# Altium PCB Dental Sensor.PcbDoc
Units mm, origin at the board's own origin, x right, y up, seen from the top; angles counter-clockwise.
Board outline 35.78 x 6.5 mm, 2 copper layers (Top Layer, Bottom Layer), stack 0.287 mm thick; 28 components, 20 nets, 99 pads, 47 vias.
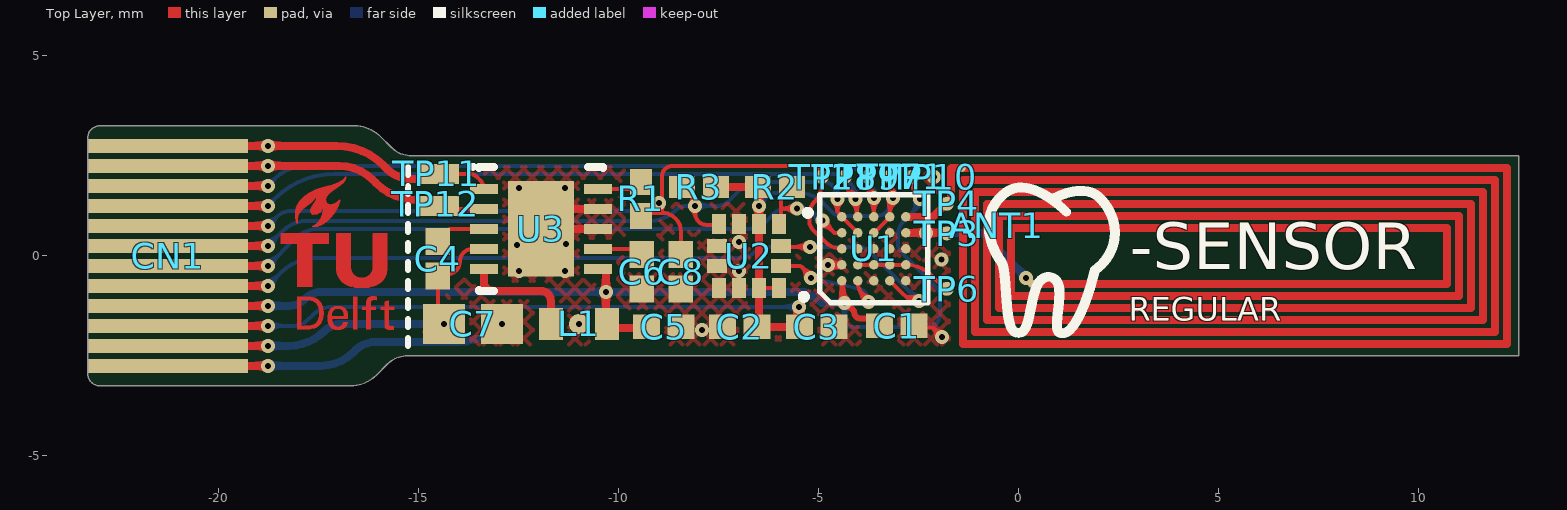
[diagram p0: Top Layer view]
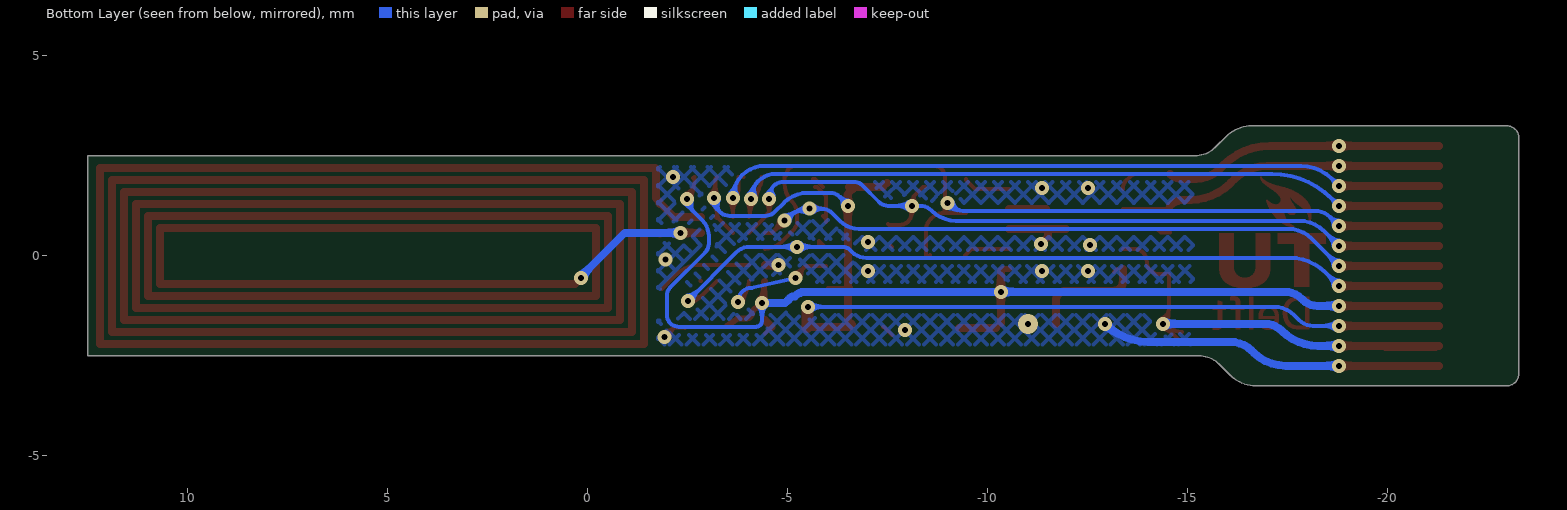
[diagram p1: Bottom Layer view, seen from below]

## Layer stack, top to bottom
Flex Stack Top Coverlay: solder mask 0.05, FC-001, Dk 4
Top Layer: signal copper 0.018
Core: core 0.051, Core-025, Dk 4.6
Bottom Layer: signal copper 0.018
Flex Stack Bottom Coverlay: solder mask 0.05, FC-001, Dk 4
Stiffener 1: core 0.2, Core-009, Dk 4.5

## Board outline
-22.984,-3.25 cw(c-22.975,-2.95) -23.275,-2.941 -23.275,2.941 -23.275,2.959 cw(c-22.975,2.95) -22.966,3.25 -16.6,3.25 cw(c-16.6,2.345) -15.96,2.985 -15.687,2.712 ccw(c-15.175,3.224) -15.175,2.5 12.5,2.5 12.5,-2.5 -15.275,-2.5 ccw(c-15.275,-3.224) -15.787,-2.712 -16.06,-2.985 cw(c-16.7,-2.345) -16.7,-3.25

## Design rules (kind name [scope] priority, off if disabled: settings)
BoardOutlineClearance "Edge Connector" [HasFootprint('52745-1297')] p1: gap=0 ignorepadtopadclearanceinfootprint=FALSE
BoardOutlineClearance [All] p2: gap=0.2 ignorepadtopadclearanceinfootprint=FALSE
Clearance Clearance_Testpad [InComponent('TP*')] p1: gap=0.1 ignorepadtopadclearanceinfootprint=FALSE except(0.06: Arc-SMDPad Track-SMDPad SMDPad-SMDPad)
Clearance [All] p2: gap=0.1 ignorepadtopadclearanceinfootprint=FALSE
ComponentClearance [InComponent('TP*')] p1: gap=0 collisioncheckmode=3 verticalgap=0.15 showdistances=FALSE
ComponentClearance ComponentClearance_1 [All] p2: gap=0.15 collisioncheckmode=3 verticalgap=0.15 showdistances=FALSE
DiffPairsRouting [All] p1: maxlimit=0.254 minlimit=0.254 mostfreqgap=0.254 toplayer_minwidth=0.381 toplayer_maxwidth=0.381 toplayer_prefwidth=0.381 bottomlayer_minwidth=0.381 bottomlayer_maxwidth=0.381 bottomlayer_prefwidth=0.381 substack1={9C96DA8B-F9AD-4D0B-9D00-B80C23C507E5} toplayer_{9c96da8b-f9ad-4d0b-9d00-b80c23c507e5}_minwidth=0.381 toplayer_{9c96da8b-f9ad-4d0b-9d00-b80c23c507e5}_maxwidth=0.381 toplayer_{9c96da8b-f9ad-4d0b-9d00-b80c23c507e5}_prefwidth=0.381 bottomlayer_{9c96da8b-f9ad-4d0b-9d00-b80c23c507e5}_minwidth=0.381 bottomlayer_{9c96da8b-f9ad-4d0b-9d00-b80c23c507e5}_maxwidth=0.381 bottomlayer_{9c96da8b-f9ad-4d0b-9d00-b80c23c507e5}_prefwidth=0.381 maxuncoupledlength=12.7
HoleSize [All] p1: absolutevalues=TRUE maxlimit=2.54 minlimit=0.15 maxpercent=80.000 minpercent=20.000
MinimumAnnularRing [All] p1: minimumring=0.1
MinimumSolderMaskSliver BGA [HasFootprint('WLCSP25')] p1: minsoldermaskwidth=0.06
MinimumSolderMaskSliver [All] p2: minsoldermaskwidth=0.09
PolygonConnect [All] p1: connectstyle=Direct reliefconductorwidth=0.254 reliefentries=4 polygonreliefangle="90 Angle" airgapwidth=0.1
RoutingVias [All] p1: holewidth=0.15 width=0.35 viastyle="Through Hole" minholewidth=0.15 minwidth=0.35 maxholewidth=1 maxwidth=2
SilkToSolderMaskClearance [IsPad] p1: minsilkscreentomaskgap=0.2 clearancetoexposedcopper=TRUE
SolderMaskExpansion [All] p1: expansion=0.102 istentingtop=FALSE
UnRoutedNet [All] p1: checkbadconnections=TRUE
Width [All] p1: maxlimit=1 minlimit=0.06 preferedwidth=0.15 substack1={9C96DA8B-F9AD-4D0B-9D00-B80C23C507E5} minimp=50.000000 maximp=50.000000 favimp=50.000000
24 further rules are at their usual default settings.

## Components (designator, comment, footprint, x,y, rotation, side; value= is the part's Value field where it differs from the comment)
ANT1 "Antenna" "NFC Antenna" 5.275,-0.1 r0 top net-tie
C1 "0.10µF" CAPC1005X03N -3.05,-1.75 r0 top
C2 "2.2µF" CAPC1005X03N -6.975,-1.775 r180 top
C3 "0.10µF" CAPC1005X03N -5.05,-1.775 r0 top
C4 "1µF" CAPC1005X03N -14.525,-0.075 r90 top
C5 "10µF" CAPC1005X03N -8.875,-1.775 r0 top
C6 "4.7µF" CAPC1005X03N -9.425,-0.4 r270 top
C7 "22µF" CAPC1608X12N -13.65,-1.7 r0 top
C8 "1000pF" CAPC1005X03N -8.45,-0.4 r270 top
CN1 "FPC Connector" 52745-1297 -21.275,0 r0 top locked
L1 "MLZ1608N100LT000" FP-MLZ1608-MFG -11,-1.7 r0 top
R1 "1M" RESC1005X03N -9.45,1.425 r270 top
R2 "47K" RESC1005X03N -6.1,1.725 r180 top value=47k
R3 "47k" RESC1005X03N -8,1.725 r0 top
TP1 "Testpoint" "Testpoint 0.35mm" -2.662,1.975 r90 top
TP2 "Testpoint" "Testpoint 0.35mm" -4.923,1.975 r90 top
TP3 "Testpoint" "Testpoint 0.35mm" -1.8,0.561 r90 top
TP4 "Testpoint" "Testpoint 0.35mm" -1.8,1.3 r90 top
TP6 "Testpoint" "Testpoint 0.35mm" -1.8,-0.825 r90 top
TP7 "Testpoint" "Testpoint 0.35mm" -3.225,1.975 r90 top
TP8 "Testpoint" "Testpoint 0.35mm" -4.348,1.975 r90 top
TP9 "Testpoint" "Testpoint 0.35mm" -3.774,1.975 r90 top
TP10 "Testpoint" "Testpoint 0.35mm" -2.125,1.975 r90 top
TP11 "Testpoint" "Testpoint 0.35mm" -14.55,2.05 r90 top
TP12 "Testpoint" "Testpoint 0.35mm" -14.575,1.3 r90 top
U1 "NHS3152UK" WLCSP25 -3.625,0.175 r90 top
U2 "AIS2DW12TR" FP-LGA12-DM00369449-MFG -6.75,0 r270 top
U3 "LTC3588EDD-1#PBF" LT-DD-10_V -11.95,0.675 r0 top

## Footprints (in the part's own frame and the unit in brackets; to place one, negate y for a bottom-side part, rotate by r counter-clockwise, add the part's x,y. Pads: shape width x height; smd on the part's side, far side on the other; paste and mask are expansions set on the pad)
52745-1297 [mm] "Cable Side"
  rect 4x0.35 smd paste-2: 1(0,-2.75) 2(0,-2.25) 3(0,-1.75) 4(0,-1.25) 5(0,-0.75) 6(0,-0.25) 7(0,0.25) 8(0,0.75) 9(0,1.25) 10(0,1.75) 11(0,2.25) 12(0,2.75)
CAPC1005X03N [mm] "Chip Capacitor, 2-Leads, Body 1,00x0,50mm, IPC Medium Density"
  rect 0.68x0.62 smd: 1(-0.43,0) 2(0.43,0)
  body extent -0.55,-0.28 0.55,0.27, height 0.3
CAPC1608X12N [mm] "Chip Capacitor, 2-Leads, Body 1,60x0,80mm, IPC Medium Density"
  rect 1.05x1 smd: 1(-0.725,0) 2(0.725,0)
  body extent -0.9,-0.5 0.9,0.5, height 1.2
FP-LGA12-DM00369449-MFG [mm]
  rect 0.5x0.35 smd paste+0 mask+0: 1(-0.8,0.75) 2(-0.8,0.25) 3(-0.8,-0.25) 4(-0.8,-0.75) 7(0.8,-0.75) 8(0.8,-0.25) 9(0.8,0.25) 10(0.8,0.75)
  rect 0.35x0.5 smd paste+0 mask+0: 5(-0.25,-0.8) 6(0.25,-0.8) 11(0.25,0.8) 12(-0.25,0.8)
  silkscreen extent -1.12,1.43 -1.03,1.52, body extent -1.55,-1.55 1.55,1.55, height 0.25
FP-MLZ1608-MFG [mm]
  rect 0.6x0.8 smd paste+0 mask+0: 1(-0.7,0) 2(0.7,0)
  body extent -1.1,-0.58 1.1,0.58, height 0.25
LT-DD-10_V [mm] "SON, 10-Leads, Body 3x3mm, Pitch 0.5mm, Thermal Pad 2.38x1.65mm"
  rect 0.7x0.25 smd mask+0.08: 1(-1.425,1) 2(-1.425,0.5) 3(-1.425,0) 4(-1.425,-0.5) 5(-1.425,-1) 6(1.425,-1) 7(1.425,-0.5) 8(1.425,0) 9(1.425,0.5) 10(1.425,1)
  rect 1.65x2.38 smd mask+0.08: 11(0,0)
  silkscreen extent -1.75,-1.55 1.55,1.6, body extent -1.5,-1.5 1.5,1.5, height 0.8
"NFC Antenna" [mm] "4.5 x 15 mm"
  round 0.2 smd paste-2 mask+0.102: 2(-4.95,-0.6) ""(-6.7,2.3)
  Top Layer lines w0.2: -6.7,2.3 6.925,2.3 6.925,-2.1 -6.675,-2.1 -6.675,2 6.625,2 6.625,-1.8 -6.375,-1.8 -6.375,1.7 6.325,1.7 6.325,-1.5 -6.075,-1.5 -6.075,1.4 6.025,1.4 6.025,-1.175 ; -4.95,-0.6 5.425,-0.6 5.425,0.8 -5.475,0.8 -5.475,-0.9 5.725,-0.9 5.725,1.1 -5.775,1.1 -5.775,-1.2 6.025,-1.2
RESC1005X03N [mm] "Chip Resistor, 2-Leads, Body 1,00x0,50mm, IPC Medium Density"
  rect 0.65x0.55 smd: 1(-0.425,0) 2(0.425,0)
  body extent -0.55,-0.27 0.55,0.28, height 0.3
"Testpoint 0.35mm" [mm]
  round 0.35 smd paste-2 mask+0: 1(0,0)
WLCSP25 [mm]
  round 0.24 smd paste+0.018 mask+0.04: A1(-0.8,0.8) A2(-0.4,0.8) A3(0,0.8) A4(0.4,0.8) A5(0.8,0.8) B1(-0.8,0.4) B2(-0.4,0.4) B3(0,0.4) B4(0.4,0.4) B5(0.8,0.4) C1(-0.8,0) C2(-0.4,0) C3(0,0) C4(0.4,0) C5(0.8,0) D1(-0.8,-0.4) D2(-0.4,-0.4) D3(0,-0.4) D4(0.4,-0.4) D5(0.8,-0.4) E1(-0.8,-0.8) E2(-0.4,-0.8) E3(0,-0.8) E4(0.4,-0.8) E5(0.8,-0.8)
  silkscreen extent -1.35,-1.35 1.35,1.8, body extent -1.27,-1.27 1.27,1.27, height 0.54

## Part data
ANT1: library part "NFC Antenna", "Track 0.2; Gap 0.1; Height 4.6; Width 14.5;"
C1 C3: library part GRM155R60J104KA01D, "CAP CER 0.1UF 6.3V X5R 0402", Digi-Key Part Number=490-6287-1-ND, Manufacturer="Murata Electronics North America", Operating Temperature="-55°C ~ 85°C", Package / Case="0402 (1005 Metric)", Ratings=-, Temperature Coefficient=X5R, Tolerance=±10%, Voltage=6.3V, @ qty=0, Applications="General Purpose", Datasheets=http://www.murata.com/~/media/webrenewal/support/library/catalog/products/capacitor/mlcc/c02e.pdf, Factory Stock=0, Features=-, Height - Seated (Max)=-, Image=//media.digikey.com/Renders/Murata%20Renders/ZRB-SERIES-0402.jpg, Lead Spacing=-, Minimum Quantity=1, Mounting Type="Surface Mount, MLCC", Packaging="Cut Tape (CT)", Part Number=GRM155R60J104KA01D, Part Status=Active, Quantity Available=356062, Series=GRM, Size / Dimension="0.039\" L x 0.020\" W (1.00mm x 0.50mm)", Thickness (Max)="0.022\" (0.55mm)", Unit Price (USD)=0.1
C2: library part GRT155R60J225KE01D, "CAP CER 2.2UF 6.3V X5R 0402", Digi-Key Part Number=490-12250-1-ND, Manufacturer="Murata Electronics North America", Operating Temperature="-55°C ~ 85°C", Package / Case="0402 (1005 Metric)", Ratings=AEC-Q200, Temperature Coefficient=X5R, Tolerance=±10%, Voltage=6.3V, @ qty=0, Applications=Automotive, Datasheets=http://search.murata.co.jp/Ceramy/image/img/A01X/G101/ENG/GRT155R60J225KE01-01.pdf, Factory Stock=0, Features=-, Height - Seated (Max)=-, Image=//media.digikey.com/Renders/Murata%20Renders/ZRB-SERIES-0402.jpg, Lead Spacing=-, Lead Style=-, Minimum Quantity=1, Mounting Type="Surface Mount, MLCC", Packaging="Cut Tape (CT)", Part Number=GRT155R60J225KE01D, Part Status=Active, Quantity Available=39775, Series=GRT, Size / Dimension="0.039\" L x 0.020\" W (1.00mm x 0.50mm)", Thickness (Max)="0.022\" (0.55mm)", Unit Price (USD)=0.12
C4: library part GRM155R70J105MA12D, "CAP CER 1UF 6.3V X7R 0402", Digi-Key Part Number=490-9665-1-ND, Manufacturer="Murata Electronics North America", Operating Temperature="-55°C ~ 125°C", Package / Case="0402 (1005 Metric)", Ratings=-, Temperature Coefficient=X7R, Tolerance=±20%, Voltage=6.3V, @ qty=0, Applications="General Purpose", Datasheets=http://www.murata.com/~/media/webrenewal/support/library/catalog/products/capacitor/mlcc/c02e.pdf, Factory Stock=0, Features="Derating Recommended", Height - Seated (Max)=-, Image=//media.digikey.com/Renders/Murata%20Renders/ZRB-SERIES-0402.jpg, Lead Spacing=-, Lead Style=-, Minimum Quantity=1, Mounting Type="Surface Mount, MLCC", Packaging="Cut Tape (CT)", Part Number=GRM155R70J105MA12D, Part Status=Active, Quantity Available=38208, Series=GRM, Size / Dimension="0.039\" L x 0.020\" W (1.00mm x 0.50mm)", Thickness (Max)="0.022\" (0.55mm)", Unit Price (USD)=0.1
C5: library part GRM155R60J106ME44D, "CAP CER 10UF 6.3V X5R 0402", Digi-Key Part Number=490-13811-1-ND, Manufacturer="Murata Electronics North America", Operating Temperature="-55°C ~ 85°C", Package / Case="0402 (1005 Metric)", Ratings=-, Temperature Coefficient=X5R, Tolerance=±20%, Voltage=6.3V, @ qty=0, Applications="General Purpose", Datasheets=http://www.murata.com/~/media/webrenewal/support/library/catalog/products/capacitor/mlcc/c02e.pdf, Factory Stock=0, Features=-, Height - Seated (Max)=-, Image=//media.digikey.com/Renders/Murata%20Renders/ZRB-SERIES-0402.jpg, Lead Spacing=-, Lead Style=-, Minimum Quantity=1, Mounting Type="Surface Mount, MLCC", Packaging="Cut Tape (CT)", Part Number=GRM155R60J106ME44D, Part Status=Active, Quantity Available=191464, Series=GRM, Size / Dimension="0.039\" L x 0.020\" W (1.00mm x 0.50mm)", Thickness (Max)="0.022\" (0.55mm)", Unit Price (USD)=0.23
C6: library part ZRB15XR60J475ME01D, "CAP CER 4.7UF 6.3V X5R 0402", Digi-Key Part Number=490-10983-1-ND, Manufacturer="Murata Electronics North America", Operating Temperature="-55°C ~ 85°C", Package / Case="0402 (1005 Metric)", Ratings=-, Temperature Coefficient=X5R, Tolerance=±20%, Voltage=6.3V, @ qty=0, Applications="Acoustic Noise Reduction", Datasheets=http://search.murata.co.jp/Ceramy/image/img/A01X/G101/ENG/ZRB15XR60J475ME01-01.pdf, Factory Stock=0, Features="Interposer Termination", Height - Seated (Max)=-, Image=//media.digikey.com/Renders/Murata%20Renders/ZRB-SERIES-0402.jpg, Lead Spacing=-, Lead Style=-, Minimum Quantity=1, Mounting Type="Surface Mount, MLCC", Packaging="Cut Tape (CT)", Part Number=ZRB15XR60J475ME01D, Part Status=Active, Quantity Available=10846, Series=ZRB, Size / Dimension="0.039\" L x 0.020\" W (1.00mm x 0.50mm)", Thickness (Max)="0.031\" (0.80mm)", Unit Price (USD)=0.36
C7: library part GRM187R61A226ME15D, "CAP CER 22UF 10V X5R 0603", Digi-Key Part Number=490-13243-1-ND, Manufacturer="Murata Electronics North America", Operating Temperature="-55°C ~ 85°C", Package / Case=0603, Ratings=-, Temperature Coefficient=X5R, Tolerance=±20%, Voltage=25V, @ qty=0, Applications="General Purpose", Datasheets=http://psearch.en.murata.com/capacitor/product/GRM187R61A226ME15%23.pdf, Factory Stock=0, Features="Derating Recommended", Height - Seated (Max)=-, Image=//media.digikey.com/Renders/Murata%20Renders/ZRB-SERIES-0402.jpg, Lead Spacing=-, Lead Style=-, Minimum Quantity=1, Mounting Type="Surface Mount, MLCC", Packaging="Cut Tape (CT)", Part Number=GRM187R61A226ME15D, Part Status=Active, Quantity Available=10253, Series=GRM, Size / Dimension="0.063\" L x 0.031\" W (1.60mm x 0.80mm)", Thickness (Max)="0.031\" (0.80mm)", Unit Price (USD)=0.54
C8: library part GRM155R60J102KA01D, "CAP CER 1000PF 6.3V X5R 0402", Digi-Key Part Number=490-6285-1-ND, Manufacturer="Murata Electronics North America", Operating Temperature="-55°C ~ 85°C", Package / Case="0402 (1005 Metric)", Ratings=-, Temperature Coefficient=X5R, Tolerance=±10%, Voltage=6.3V, @ qty=0, Applications="General Purpose", Datasheets=http://www.murata.com/~/media/webrenewal/support/library/catalog/products/capacitor/mlcc/c02e.pdf, Factory Stock=0, Features=-, Height - Seated (Max)=-, Image=//media.digikey.com/Renders/Murata%20Renders/ZRB-SERIES-0402.jpg, Lead Spacing=-, Minimum Quantity=1, Mounting Type="Surface Mount, MLCC", Packaging="Cut Tape (CT)", Part Number=GRM155R60J102KA01D, Part Status=Active, Quantity Available=65829, Series=GRM, Size / Dimension="0.039\" L x 0.020\" W (1.00mm x 0.50mm)", Thickness (Max)="0.022\" (0.55mm)", Unit Price (USD)=0.1
CN1: library part 52745-1297, "FFC / FPC Board Connector, 0.5 mm, 12 Contacts, Receptacle, Easy-On 52745, Surface Mount, Top"
L1: library part CMP-08253-000255-1, "Shielded Multilayer Inductor 10uH ±20% 300mA 780mΩ SMD 0603", Case Code (Imperial)=0603, Case Code (Metric)=1608, Current Rating=300mA, DC Resistance (DCR)=780mR, Inductance=10uH, Max Operating Temperature=125°C, Min Operating Temperature=-55°C, Package Quantity=4000, Saturation Current=60mA, Self Resonant Frequency=50MHz, Test Frequency=2MHz, Tolerance=20%, Case/Package=0603, Core Material=Ferrite, Height - Seated (Max)=0.037inch, Lead Free="Lead Free", Length=0.063inch, Mount="Surface Mount", Packaging="Tape and Reel", RoHS Compliant=Yes, Shielding=Shielded, Width=0.031inch
R1: library part ERJ-2RKF1004X, "RES SMD 1M OHM 1% 1/10W 0402", Digi-Key Part Number=P1.00MLCT-ND, Manufacturer="Panasonic Electronic Components", Operating Temperature="-55°C ~ 155°C", Package / Case="0402 (1005 Metric)", Power (Watts)="0.1W, 1/10W", Supplier Device Package=0402, Temperature Coefficient=±100ppm/°C, Tolerance=±1%, @ qty=1500, Composition="Thick Film", Datasheets=http://industrial.panasonic.com/www-cgi/jvcr13pz.cgi?E+PZ+3+AOA0002+ERJ2RKF1004X+7+WW, Factory Stock=0, Failure Rate=-, Features="Automotive AEC-Q200", Height - Seated (Max)="0.016\" (0.40mm)", Image=//media.digikey.com/Photos/Panasonic%20Photos/ERJ-PA2-Series.jpg, Minimum Quantity=1, Number of Terminations=2, Packaging="Cut Tape (CT)", Part Number=ERJ-2RKF1004X, Part Status=Active, Quantity Available=773705, Series=ERJ, Size / Dimension="0.039\" L x 0.020\" W (1.00mm x 0.50mm)", Unit Price (USD)=0.00496
R2 R3: library part ERJ-2RKF4702X, "RES SMD 47K OHM 1% 1/10W 0402", Digi-Key Part Number=P47.0KLCT-ND, Manufacturer="Panasonic Electronic Components", Operating Temperature="-55°C ~ 155°C", Package / Case="0402 (1005 Metric)", Power (Watts)="0.1W, 1/10W", Supplier Device Package=0402, Temperature Coefficient=±100ppm/°C, Tolerance=±1%, @ qty=1500, Composition="Thick Film", Datasheets=http://industrial.panasonic.com/www-cgi/jvcr13pz.cgi?E+PZ+3+AOA0002+ERJ2RKF4702X+7+WW, Factory Stock=0, Failure Rate=-, Features="Automotive AEC-Q200", Height - Seated (Max)="0.016\" (0.40mm)", Image=//media.digikey.com/Photos/Panasonic%20Photos/ERJ-PA2-Series.jpg, Minimum Quantity=1, Number of Terminations=2, Packaging="Cut Tape (CT)", Part Number=ERJ-2RKF4702X, Part Status=Active, Quantity Available=230515, Series=ERJ, Size / Dimension="0.039\" L x 0.020\" W (1.00mm x 0.50mm)", Unit Price (USD)=0.00496
U1: "ARM-microcontrollers - MCU NTAG NHS3152 NFC"
U2: library part CMP-12175-000014-1, "MEMS DIGITAL OUTPUT MOTION SENSO", RoHS Compliant=Yes
U3: library part CMP-0473-00034-1, "Piezoelectric Energy Harvesting Power Supply, 10-pin SON (DD-10), -40 to 125 degC, Pb-Free", Manufacturer="Linear Technology", Code_JEDEC=MO-229, ComponentLink1Description="Manufacturer URL", ComponentLink1URL=http://www.linear.com/, ComponentLink2Description=Datasheet, ComponentLink2URL=http://cds.linear.com/docs/en/datasheet/35881fa.pdf, ComponentLink3Description="Package Specification", ComponentLink3URL=http://cds.linear.com/docs/en/packaging/DFN_10_05-08-1699.pdf, DatasheetVersion="Rev. A", Energy Source=Piezoelectric, Mounting Technology="Surface Mount", Number of Outputs=1, PackageDescription="10-Pin Plastic DFN, Body 3 x 3 mm, Pitch 0.5 mm", PackageReference=DD-10, PackageVersion="Rev. C, 06/2010", PartNumber=LTC3588EDD-1#PBF, RoHS=TRUE, Topology=Buck, Vin Max(V)=20, Vin Min(V)=2.7, Vout Max(V)="1.8, 2.5, 3.3, 3.6"

## Free pads (board coordinates)
  rect 1x0.5 smd paste-2: 2(-14.5,1.25) 2(-14.5,2.05)

## Via types
v1: diameter 0.35, hole 0.15, Top Layer to Bottom Layer, tented both sides, 46 vias
v2: diameter 0.5, hole 0.15, Top Layer to Bottom Layer, tented both sides, 1 vias

## Nets (pads, with @x,y where several pads share a name; then routed paths per layer and width w, separated by ;. In a path a pad name is that pad's centre, name@x,y a point inside that pad or via, vN(x,y) a via of type N, cw(c..) or ccw(c..) an arc to the next point about the centre after c; other vN are vias at no path point)
GND: C1.2 C2.2 C3.2 C5.2 C6.2 C7.2 C8.2 CN1.1 TP10.1 U1.A2 U1.B3 U1.C1 U1.C3 U1.D3 U1.D4 U1.E1 U1.E3 U2.3 U2.5 U2.6 U2.7 U2.8 U3.8 U3.9 U3.11 | length 13.2
  Top Layer w0.1: C2.2@-7.605,-1.975 C2.2 C2.2@-7.375,-1.775 ; U2.5@-7.6,0.225 U2.5@-7.584,0.241 ; C3.2@-4.595,-1.775 C3.2@-4.433,-1.937 ; U1.E1 U1.E1@-2.823,-0.627 ; C1.2@-2.425,-1.799 -2.419,-1.794 -2.156,-1.794 v1@-1.922,-2.028
  Top Layer w0.2: CN1.1 v1(-18.775,-2.75) ; U3.11 U3.11@-11.5,0.675 ; U3.11@-11.45,1.175 U3.9 ; v1(-11.325,0.3) -11.5,0.475 U3.11@-11.5,0.675 ; U3.8 U3.11@-11.5,0.675 ; v1(-4.765,-0.233) -4.433,-0.233 U1.A2 ; C3.2@-4.595,-1.775 C3.2@-4.43,-1.61
  Bottom Layer w0.2: v1(-18.775,-2.75) -17.452,-2.75 ccw(c-17.452,-1.599) -16.638,-2.413 -16.6,-2.375 cw(c-16.057,-2.918) -16.057,-2.15 -14.011,-2.15 ccw(c-14.011,-0.614) v1(-12.925,-1.7)
  other v1: -1.922,-2.029 -7.925,-1.85 -12.5,-0.375 -11.35,-0.375 -7,-0.375 -1.938,-0.099 -12.55,0.275 -7,0.35 -12.5,1.7 -11.35,1.7 -2.125,1.975
  other v2: -11,-1.7
INT2: U1.B1 U2.11 | length 3.1
  Top Layer w0.1: U2.11 -5.521,-0.25 cw(c-5.521,-0.421) -5.4,-0.3 -5.199,-0.501 v1(-5.199,-0.555) ; U1.B1 ccw(c-3.398,-0.625) v1@-3.841,-1.068
  Bottom Layer w0.1: v1(-5.199,-0.555) -4.1,-0.8 cw(c-4.1,-1.145) -4.091,-0.8 cw(c-4.1,-1.145) v1@-3.755,-1.145
  other v1: -3.755,-1.155
NetANT1_1: ANT1. TP4.1 U1.E5 | length 2.4
  Top Layer w0.2: U1.E5 -2.147,0.975 -1.822,1.3 TP4.1 ; TP4.1@-1.795,1.305 -1.795,1.346 -1.7,1.441 -1.7,2.177 -1.677,2.2 ANT1.@-1.4,2.2
NetANT1_2: ANT1.2 TP3.1 U1.E4 | length 4.3
  Top Layer w0.2: U1.E4 v1(-2.319,0.575) -1.814,0.575 TP3.1 ; v1(0.175,-0.55) ANT1.2 ANT1.2@0.35,-0.7
  Bottom Layer w0.2: v1(-2.319,0.575) -0.925,0.575 v1@0.2,-0.55
NetC4_2: C4.2 U3.3 | length 1.2
  Top Layer w0.1: C4.2@-14.55,0.585 -14.325,0.585 -14.235,0.675 U3.3
NetC6_1: C6.1 U3.7 | length 1.2
  Top Layer w0.1: U3.7 -9.595,0.175 C6.1@-9.425,0.005
NetL1_1: L1.1 U3.5 | length 3
  Top Layer w0.1: U3.5@-13.234,-0.325 U3.5@-13.159,-0.4
  Top Layer w0.2: U3.5 -13.375,-0.65 ccw(c-13.15,-0.65) -13.15,-0.875 -11.95,-0.875 cw(c-11.95,-1.125) -11.7,-1.125 L1.1
NetR1_1: R1.1 U3.10 | length 1.2
  Top Layer w0.1: U3.10 -9.675,1.675 -9.45,1.9 R1.1@-9.45,1.925
PZ1: CN1.12 pad.2@-14.5,2.05 TP11.1 U3.1 | length 8.4
  Top Layer w0.1: pad.2@-14.545,2.045 -13.72,2.045 cw(c-13.72,1.805) -13.55,1.975 -13.463,1.888 cw(c-13.677,1.675) U3.1
  Top Layer w0.2: CN1.12 v1(-18.775,2.75) -17.059,2.75 cw(c-17.059,1.099) -15.891,2.266 -15.797,2.172 ccw(c-15.2,2.77) -15.2,1.925 -14.852,1.925 ccw(c-14.852,2.352) TP11.1
PZ2: CN1.11 pad.2@-14.5,1.25 TP12.1 U3.2 | length 8.2
  Top Layer w0.1: pad.2@-14.538,1.262 -14.45,1.175 U3.2
  Top Layer w0.2: CN1.11 v1(-18.775,2.25) -16.995,2.25 cw(c-16.995,1.055) -16.151,1.901 -16.057,1.807 ccw(c-15.075,2.788) -15.075,1.4 -14.912,1.4 cw(c-14.912,0.888) -14.608,1.3 cw(c-14.912,0.888) -14.591,1.287 cw(c-14.912,0.888) pad.2@-14.55,1.25
RESET: C8.1 CN1.8 R1.2 TP2.1 U1.A3 | length 22
  Top Layer w0.1: R1.2@-9.45,1.075 -8.925,1.075 ; v1(-8.992,1.32) -8.925,1.252 -8.925,1.075 ; v1@-8.925,1.275 -8.925,1.975 cw(c-8.65,1.975) -8.65,2.25 -5.198,2.25 cw(c-5.198,2.018) -4.966,2.018 TP2.1 -4.923,1.8 cw(c-5.575,1.8) -5.114,1.339 ccw(c-4.819,1.044) -5.236,1.044 -5.236,0.903 ccw(c-4.912,0.877) -5.117,0.625 -4.838,0.346 ccw(c-4.425,0.759) U1.A3 ; C8.1@-8.561,0.021 C8.1@-8.54,0 ; C8.1@-8.45,0.005 C8.1 -8.45,0.623 ccw(c-8.877,0.623) -8.575,0.925 -8.584,0.934 ccw(c-8.925,0.592) -8.925,1.075
  Top Layer w0.2: CN1.8 v1(-18.775,0.75)
  Bottom Layer w0.1: v1(-18.775,0.75) -18.559,0.966 cw(c-18.175,0.582) -18.175,1.125 -9.375,1.125 ccw(c-9.375,1.579) -9.054,1.258 v1(-8.992,1.32)
SCL: CN1.6 R2.1 U1.A4 U2.1 | length 19.5
  Top Layer w0.1: U2.1@-5.95,0.85 U2.1@-5.95,0.917 ; U2.1@-5.875,0.992 U2.1@-5.95,0.917 ; R2.1@-5.875,1.725 -5.675,1.925 R2.1@-5.625,1.925 ; R2.1 -5.725,1.725 -5.95,1.5 -5.95,1.209 ; v1(-5.548,1.179) -5.879,1.179 cw(c-5.879,1.279) -5.95,1.209 ; v1(-4.912,0.877) -4.61,0.575 U1.A4 ; U2.1@-5.95,0.917 -5.95,1.209
  Top Layer w0.2: CN1.6 v1(-18.775,-0.25)
  Bottom Layer w0.1: v1(-18.775,-0.25) -18.097,0.428 cw(c-17.5,-0.17) -17.5,0.675 -6.775,0.675 ccw(c-6.775,1.339) -6.306,0.869 -6.106,1.069 cw(c-5.85,0.813) -5.85,1.175 -5.553,1.175 v1(-5.548,1.179) cw(c-5.548,0.372) -4.977,0.943 v1(-4.912,0.877) ; v1@-5.525,1.156 v1@-5.525,1.175
SDA: CN1.7 R3.1 U1.A5 U1.B4 U2.4 | length 20.2
  Top Layer w0.1: R3.1 -8.375,1.725 -8.15,1.5 -8.15,1.368 -8.1,1.318 v1(-8.1,1.25) -8.1,1.091 ccw(c-7.759,1.091) -8,0.85 ccw(c-7.819,1.031) -7.819,0.775 -7.525,0.775 U2.4 ; v1(-4.536,1.421) -4.536,1.111 -4.425,1 U1.A5 U1.B4
  Top Layer w0.2: CN1.7 v1(-18.775,0.25)
  Bottom Layer w0.1: v1(-18.775,0.25) -18.415,0.61 cw(c-17.775,-0.03) -17.775,0.875 -9.204,0.875 ccw(c-9.204,1.729) -8.6,1.125 cw(c-8.298,0.823) -8.298,1.25 v1(-8.1,1.25) -7.5,1.25 ccw(c-7.5,1.552) -7.287,1.338 -6.863,1.762 cw(c-6.65,1.548) -6.65,1.85 -4.9,1.85 cw(c-4.9,1.486) -4.536,1.486 v1(-4.536,1.421)
SWCLK: CN1.9 TP8.1 U1.B5 | length 18.9
  Top Layer w0.1: TP8.1 ccw(c-3.668,1.975) -4.149,1.494 v1(-4.08,1.425) v1@-4.08,1.434 ; v1@-4.052,1.443 -4.052,1.002 U1.B5
  Top Layer w0.2: CN1.9 v1(-18.775,1.25)
  Bottom Layer w0.1: v1(-18.775,1.25) -18.594,1.431 cw(c-17.1,-0.062) -17.1,2.05 -4.705,2.05 cw(c-4.705,1.425) v1(-4.08,1.425)
SWDIO: CN1.10 TP9.1 U1.C5 | length 19.3
  Top Layer w0.1: TP9.1 -3.774,1.809 ccw(c-3.266,1.809) -3.629,1.454 ccw(c-3.266,1.809) v1(-3.625,1.45) U1.C5
  Top Layer w0.2: CN1.10 v1(-18.775,1.75)
  Bottom Layer w0.1: v1(-18.775,1.75) -18.593,1.932 cw(c-17.825,1.164) -17.825,2.25 -4.425,2.25 cw(c-4.425,1.45) v1(-3.625,1.45)
TX: TP6.1 U1.B2 U1.C2 U1.D2 U1.E2 | length 2.4
  Top Layer w0.1: U1.B2 U1.C2 U1.D2 U1.E2 cw(c-2.825,-1.13) -2.185,-0.49 TP6.1@-1.85,-0.825
VDDBAT: C1.1 C5.1 CN1.4 L1.2 TP1.1 U1.A1 U3.6 | length 28.6
  Top Layer w0.1: TP1.1@-2.632,1.945 TP1.1 -2.662,1.877 ccw(c-2.023,1.877) v1(-2.475,1.425) v1@-2.475,1.493
  Top Layer w0.15: U3.6 -10.375,-0.325 U3.6@-10.325,-0.375 ; L1.2@-10.325,-1.675 L1.2@-10.2,-1.8 ; U1.A1 -4.408,-0.642 v1@-4.408,-1.082 ; v1@-4.37,-1.128 v1@-4.37,-1.12 ; v1(-4.356,-1.175) -4.259,-1.273 ccw(c-4.153,-1.166) -4.213,-1.303 cw(c-4.28,-1.465) -4.107,-1.44 ccw(c-3.958,-1.418) -3.958,-1.568 -3.745,-1.568 C1.1
  Top Layer w0.2: CN1.4 v1(-18.775,-1.25) ; L1.2@-10.325,-1.675 v1(-10.325,-0.9) U3.6@-10.325,-0.375 ; L1.2@-10.2,-1.8 C5.1@-9.28,-1.8
  Bottom Layer w0.1: v1(-4.356,-1.175) -4.356,-1.625 ccw(c-4.206,-1.625) -4.206,-1.775 -2.275,-1.775 ccw(c-2.275,-1.475) -1.975,-1.475 -1.975,-0.997 ; v1(-2.475,1.425) -2.481,1.419 -2.481,1.269 -2.863,0.887 ccw(c-2.47,0.495) -3.025,0.495 -3.025,0.3 ccw(c-2.723,0.3) -2.937,0.087 -2.061,-0.789 ; -2.06,-0.79 cw(c-2.266,-0.996) -1.975,-0.996
  Bottom Layer w0.2: v1(-18.775,-1.25) -18.237,-1.25 ccw(c-18.237,-0.738) -17.875,-1.1 -17.852,-1.077 cw(c-17.425,-1.504) -17.425,-0.9 v1(-10.325,-0.9) -5.385,-0.9 -5.34,-0.902 -5.317,-0.926 -5.292,-0.926 -5.224,-0.969 -5.181,-1.012 cw(c-5.183,-1.212) -5.026,-1.087 -5.016,-1.1 ccw(c-4.86,-0.975) -4.982,-1.133 -4.928,-1.175 -4.86,-1.175 v1(-4.356,-1.175)
VEXT: C2.1 C3.1 CN1.3 R2.2 R3.2 TP7.1 U1.C4 U1.D5 U2.2 U2.9 U2.10 | length 28.1
  Top Layer w0.1: U2.9@-6.528,-0.8 U2.9 U2.10 ; U1.C4 U1.D5 ; TP7.1 -3.187,1.937 -3.187,1.481 v1(-3.15,1.444) -3.15,1.376 -3.225,1.301 -3.225,0.986 U1.D5@-3.22,0.98
  Top Layer w0.15: U1.D5 U1.D5@-3.22,0.98
  Top Layer w0.2: CN1.3 v1(-18.775,-1.75) ; R3.2@-7.475,1.825 -7.375,1.725 R2.2 ; R2.2@-6.625,1.675 -6.5,1.55 v1(-6.5,1.25) U2.2 -6.5,-0.772 -6.528,-0.8 -6.5,-0.828 -6.5,-1.61 C2.1@-6.605,-1.715 ; C2.1 C3.1
  Top Layer w0.3: v1(-5.5,-1.275) -5.49,-1.285 -5.49,-1.765 C3.1
  Bottom Layer w0.1: v1(-18.775,-1.75) -18.125,-1.75 ccw(c-18.125,-1.267) -17.784,-1.609 -17.662,-1.487 cw(c-17.15,-1.999) -17.15,-1.275 v1(-5.5,-1.275) ; v1(-6.5,1.25) cw(c-6.44,1.25) -6.482,1.293 -6.3,1.475 cw(c-6.059,1.234) -6.059,1.575 -5.504,1.575 cw(c-5.504,0.721) -4.9,1.325 -4.671,1.096 ccw(c-4.439,1.328) -4.439,1 -3.541,1 ccw(c-3.541,1.341) -3.3,1.1 -3.287,1.113 ccw(c-3.618,1.444) v1(-3.15,1.444)
VIN: C4.1 C7.1 CN1.2 U3.4 | length 12.3
  Top Layer w0.1: CN1.2 -21.2,-2.325 CN1.2@-19.928,-2.325 ; C7.1@-14.858,-1.9 ccw(c-14.858,-1.217) C7.1@-14.375,-1.7 ; C7.1@-14.75,-2.075 C7.1@-14.375,-1.7 ; U3.4 -13.65,0.175 ccw(c-13.65,-0.15) -13.975,-0.15 cw(c-14.28,-0.15) -14.28,-0.455 -14.525,-0.455 -14.525,-1.338 ccw(c-14.013,-1.338) v1(-14.375,-1.7)
  Top Layer w0.2: CN1.2 v1(-18.775,-2.25)
  Bottom Layer w0.2: v1(-18.775,-2.25) -18.255,-2.25 ccw(c-18.255,-0.97) -17.35,-1.875 cw(c-16.928,-2.297) -16.928,-1.7 v1(-14.375,-1.7)
WAKE_UP: CN1.5 U1.D1 U2.12 | length 21.5
  Top Layer w0.1: U2.12@-5.887,0.263 -5.775,0.375 -5.775,0.25 -5.75,0.225 v1(-5.225,0.225) ; U1.D1 -2.884,-0.966 ccw(c-2.5,-0.582) v1(-2.5,-1.125) v1@-2.548,-1.077
  Top Layer w0.2: CN1.5 v1(-18.775,-0.75)
  Bottom Layer w0.1: v1@-18.765,-0.75 v1(-18.775,-0.75) -18.446,-0.421 cw(c-17.55,-1.317) -17.55,-0.05 -6.962,-0.05 ccw(c-6.962,0.462) -6.6,0.1 -6.546,0.154 cw(c-6.375,-0.016) -6.375,0.225 v1(-5.225,0.225) -4.05,0.225 cw(c-4.05,-0.258) -3.709,0.084 v1(-2.5,-1.125)

## Polygon pours and split planes (outlines as drawn)
no net on Layer0 "Default Coverlay 1 Top" (split plane): -22.984,-3.25 -23.044,-3.248 -23.153,-3.199 -23.234,-3.112 -23.277,-3.001 -23.275,-2.941 -23.275,2.941 -23.275,2.959 -23.273,3.019 -23.224,3.128 -23.137,3.209 -23.026,3.252 -22.966,3.25 -16.6,3.25 -16.511,3.25 -16.336,3.215 -16.171,3.147 -16.023,3.048 -15.96,2.985 -15.687,2.712 -15.634,2.664 -15.516,2.586 -15.385,2.531 -15.246,2.503 -15.175,2.5 12.5,2.5 12.5,-2.5 -15.275,-2.5 -15.346,-2.503 -15.485,-2.531 -15.616,-2.586 -15.734,-2.664 -15.787,-2.712 -16.123,-3.048 -16.271,-3.147 -16.436,-3.215 -16.611,-3.25 -16.7,-3.25
no net on Layer0 "Default Coverlay 1 Bottom" (split plane): -22.984,-3.25 -23.044,-3.248 -23.153,-3.199 -23.234,-3.112 -23.277,-3.001 -23.275,-2.941 -23.275,2.941 -23.275,2.959 -23.273,3.019 -23.224,3.128 -23.137,3.209 -23.026,3.252 -22.966,3.25 -16.6,3.25 -16.511,3.25 -16.336,3.215 -16.171,3.147 -16.023,3.048 -15.96,2.985 -15.687,2.712 -15.634,2.664 -15.516,2.586 -15.385,2.531 -15.246,2.503 -15.175,2.5 12.5,2.5 12.5,-2.5 -15.275,-2.5 -15.346,-2.503 -15.485,-2.531 -15.616,-2.586 -15.734,-2.664 -15.787,-2.712 -16.123,-3.048 -16.271,-3.147 -16.436,-3.215 -16.611,-3.25 -16.7,-3.25
GND on Top Layer "TGA" (hatched 45Degree grid 0.3 track 0.1, remove dead copper, pour order 1): -14.773,2.548 -1.745,2.548 -1.745,-2.524 -14.778,-2.524
GND on Bottom Layer "TGA" (hatched 45Degree grid 0.3 track 0.1, remove dead copper, pour order 0): -15.122,3.25 -1.75,3.25 -1.75,-3.25 -15.128,-3.25

## Other copper
Top Layer:
  region: 396 vertices and 0 holes, not listed, extent -17.064,-0.804 -15.785,0.561
  region: -18.036,-0.234 -18.036,0.298 -18.041,0.298 -18.041,0.302 -18.453,0.302 -18.453,0.307 -18.458,0.307 -18.458,0.317 -18.453,0.317 -18.453,0.552 -18.458,0.552 -18.458,0.556 -18.453,0.556 -18.453,0.566 -17.246,0.566 -17.246,0.302 -17.658,0.302 -17.658,0.298 -17.663,0.298 -17.663,-0.78 -18.036,-0.78 -18.036,-0.239
  region: 1200 vertices and 0 holes, not listed, extent -18.089,0.72 -16.815,1.98
  region: -16.311,-1.787 -16.311,-1.348 -16.417,-1.348 -16.417,-1.274 -16.314,-1.274 -16.314,-1.271 -16.311,-1.271 -16.311,-1.159 -16.309,-1.159 -16.309,-1.136 -16.306,-1.136 -16.306,-1.122 -16.303,-1.122 -16.303,-1.11 -16.3,-1.11 -16.3,-1.105 -16.297,-1.105 -16.297,-1.096 -16.294,-1.096 -16.294,-1.09 -16.291,-1.09 -16.291,-1.087 -16.289,-1.087 -16.289,-1.082 -16.286,-1.082 -16.286,-1.076 -16.283,-1.076 -16.283,-1.073 -16.28,-1.073 -16.28,-1.067 -16.277,-1.067 -16.277,-1.064 -16.274,-1.064 -16.274,-1.062 -16.271,-1.062 -16.271,-1.059 -16.268,-1.059 -16.268,-1.056 -16.266,-1.056 -16.266,-1.053 -16.263,-1.053 -16.263,-1.05 -16.257,-1.05 -16.257,-1.047 -16.254,-1.047 -16.254,-1.044 -16.251,-1.044 -16.251,-1.041 -16.246,-1.041 -16.246,-1.039 -16.243,-1.039 -16.243,-1.036 -16.237,-1.036 -16.237,-1.033 -16.231,-1.033 -16.231,-1.03 -16.225,-1.03 -16.225,-1.027 -16.217,-1.027 -16.217,-1.024 -16.211,-1.024 -16.211,-1.021 -16.203,-1.021 -16.203,-1.019 -16.191,-1.019 -16.191,-1.016 -16.18,-1.016 -16.18,-1.013 -16.094,-1.013 -16.094,-1.016 -16.082,-1.016 -16.082,-1.019 -16.068,-1.019 -16.068,-1.021 -16.059,-1.021 -16.059,-1.024 -16.056,-1.024 -16.056,-1.107 -16.059,-1.107 -16.059,-1.11 -16.091,-1.11 -16.091,-1.107 -16.134,-1.107 -16.134,-1.11 -16.154,-1.11 -16.154,-1.113 -16.165,-1.113 -16.165,-1.116 -16.171,-1.116 -16.171,-1.119 -16.177,-1.119 -16.177,-1.122 -16.182,-1.122 -16.182,-1.125 -16.185,-1.125 -16.185,-1.127 -16.188,-1.127 -16.188,-1.133 -16.191,-1.133 -16.191,-1.136 -16.194,-1.136 -16.194,-1.142 -16.197,-1.142 -16.197,-1.15 -16.2,-1.15 -16.2,-1.162 -16.203,-1.162 -16.203,-1.271 -16.2,-1.271 -16.2,-1.274 -16.074,-1.274 -16.074,-1.348 -16.203,-1.348 -16.203,-1.832 -16.311,-1.832 -16.311,-1.789
  region: -16.641,-1.07 -16.641,-1.027 -16.535,-1.027 -16.535,-1.832 -16.641,-1.832 -16.641,-1.073
  region: 495 vertices and 1 holes, not listed, extent -17.277,-1.85 -16.77,-1.256
  region: 301 vertices and 1 holes, not listed, extent -18.039,-1.832 -17.38,-1.027
  region: -15.75,-1.13 -15.75,-1.271 -15.747,-1.271 -15.747,-1.274 -15.618,-1.274 -15.618,-1.345 -15.621,-1.345 -15.621,-1.348 -15.75,-1.348 -15.75,-1.718 -15.747,-1.718 -15.747,-1.732 -15.744,-1.732 -15.744,-1.738 -15.741,-1.738 -15.741,-1.741 -15.739,-1.741 -15.739,-1.746 -15.736,-1.746 -15.736,-1.749 -15.733,-1.749 -15.733,-1.752 -15.727,-1.752 -15.727,-1.755 -15.724,-1.755 -15.724,-1.758 -15.718,-1.758 -15.718,-1.761 -15.713,-1.761 -15.713,-1.764 -15.701,-1.764 -15.701,-1.767 -15.684,-1.767 -15.684,-1.769 -15.675,-1.769 -15.675,-1.767 -15.647,-1.767 -15.647,-1.764 -15.633,-1.764 -15.633,-1.761 -15.624,-1.761 -15.624,-1.844 -15.635,-1.844 -15.635,-1.847 -15.658,-1.847 -15.658,-1.85 -15.739,-1.85 -15.739,-1.847 -15.761,-1.847 -15.761,-1.844 -15.773,-1.844 -15.773,-1.841 -15.784,-1.841 -15.784,-1.838 -15.793,-1.838 -15.793,-1.835 -15.799,-1.835 -15.799,-1.832 -15.804,-1.832 -15.804,-1.83 -15.81,-1.83 -15.81,-1.827 -15.816,-1.827 -15.816,-1.824 -15.819,-1.824 -15.819,-1.821 -15.825,-1.821 -15.825,-1.818 -15.827,-1.818 -15.827,-1.815 -15.83,-1.815 -15.83,-1.812 -15.833,-1.812 -15.833,-1.807 -15.836,-1.807 -15.836,-1.804 -15.839,-1.804 -15.839,-1.798 -15.842,-1.798 -15.842,-1.795 -15.845,-1.795 -15.845,-1.789 -15.847,-1.789 -15.847,-1.781 -15.85,-1.781 -15.85,-1.772 -15.853,-1.772 -15.853,-1.755 -15.856,-1.755 -15.856,-1.351 -15.859,-1.351 -15.859,-1.348 -15.953,-1.348 -15.953,-1.274 -15.859,-1.274 -15.859,-1.271 -15.856,-1.271 -15.856,-1.153 -15.85,-1.153 -15.85,-1.15 -15.842,-1.15 -15.842,-1.148 -15.833,-1.148 -15.833,-1.145 -15.825,-1.145 -15.825,-1.142 -15.813,-1.142 -15.813,-1.139 -15.804,-1.139 -15.804,-1.136 -15.796,-1.136 -15.796,-1.133 -15.787,-1.133 -15.787,-1.13 -15.779,-1.13 -15.779,-1.127 -15.767,-1.127 -15.767,-1.125 -15.759,-1.125 -15.759,-1.122 -15.75,-1.122 -15.75,-1.127

## Silkscreen, mask and mechanical layers (free items; w line width, h text height)
Flex Stack Top Overlay:
  drawing of 12 lines, arcs and shapes, not listed
  text "-SENSOR" at 2.775,-0.725 h2
  text "REGULAR" at 2.75,-1.825 h1
Flex Stack Top Coverlay:
  drawing of 8 lines, arcs and shapes, not listed
Board Shape:
  lines w0.05: -23.275,2.941 -23.275,-2.941 ccw(c-22.975,-2.95) -22.984,-3.25 -16.7,-3.25 ccw(c-16.7,-2.345) -16.06,-2.985 -15.787,-2.712 cw(c-15.275,-3.224) -15.275,-2.5 12.5,-2.5 12.5,2.5 -15.175,2.5 cw(c-15.175,3.224) -15.687,2.712 -15.96,2.985 ccw(c-16.6,2.345) -16.6,3.25 -22.966,3.25 ccw(c-22.975,2.95) -23.275,2.959
Assembly Notes:
  lines w0.1: -23.275,2.941 -23.275,-2.941 ccw(c-22.975,-2.95) -22.984,-3.25 -16.7,-3.25 ccw(c-16.7,-2.345) -16.06,-2.985 -15.787,-2.712 cw(c-15.275,-3.224) -15.275,-2.5 -1.575,-2.5 -1.575,2.5 -15.175,2.5 cw(c-15.175,3.224) -15.687,2.712 -15.96,2.985 ccw(c-16.6,2.345) -16.6,3.25 -22.966,3.25 ccw(c-22.975,2.95) -23.275,2.959
Top Courtyard:
  lines w0.1: -1.55,2.05 11.162,2.05 ; -0.95,-1.75 -0.95,1.45 10.975,1.45 11.45,1.45 11.45,-0.975 11.45,-1.45 -0.65,-1.45 -0.65,0.675 -0.65,1.15 10.675,1.15 11.15,1.15 11.15,-0.675 11.15,-1.15 -0.35,-1.15 -0.35,0.85 10.375,0.85 10.85,0.85 10.85,-0.375 10.85,-0.85 0,-0.85 ; -0.925,-1.75 11.75,-1.75 ; 10.275,2.05 12.05,2.05 12.05,-1.575 12.05,-2.05 -1.25,-2.05 -1.25,1.75 -0.7,1.75 11.275,1.75 11.75,1.75 11.75,1.2 ; 11.2,-1.75 11.75,-1.75 ; 11.75,-1.275 11.75,-1.75 ; 11.75,-1.75 11.75,1.2 ; 11.75,1.2 11.75,1.2